# Altium PCB PCB1.PcbDoc (part 2 of 2)
Units mm, origin at the board's own origin, x right, y up, seen from the top; angles counter-clockwise.
Board outline 125 x 72.5 mm, 4 copper layers (Top Layer, GND Plane, 3V3_Plane, Bottom Layer), stack 0.603 mm thick; 52 components, 52 nets, 236 pads, 121 vias.
Unrouted connection lines stored in the file: 4.
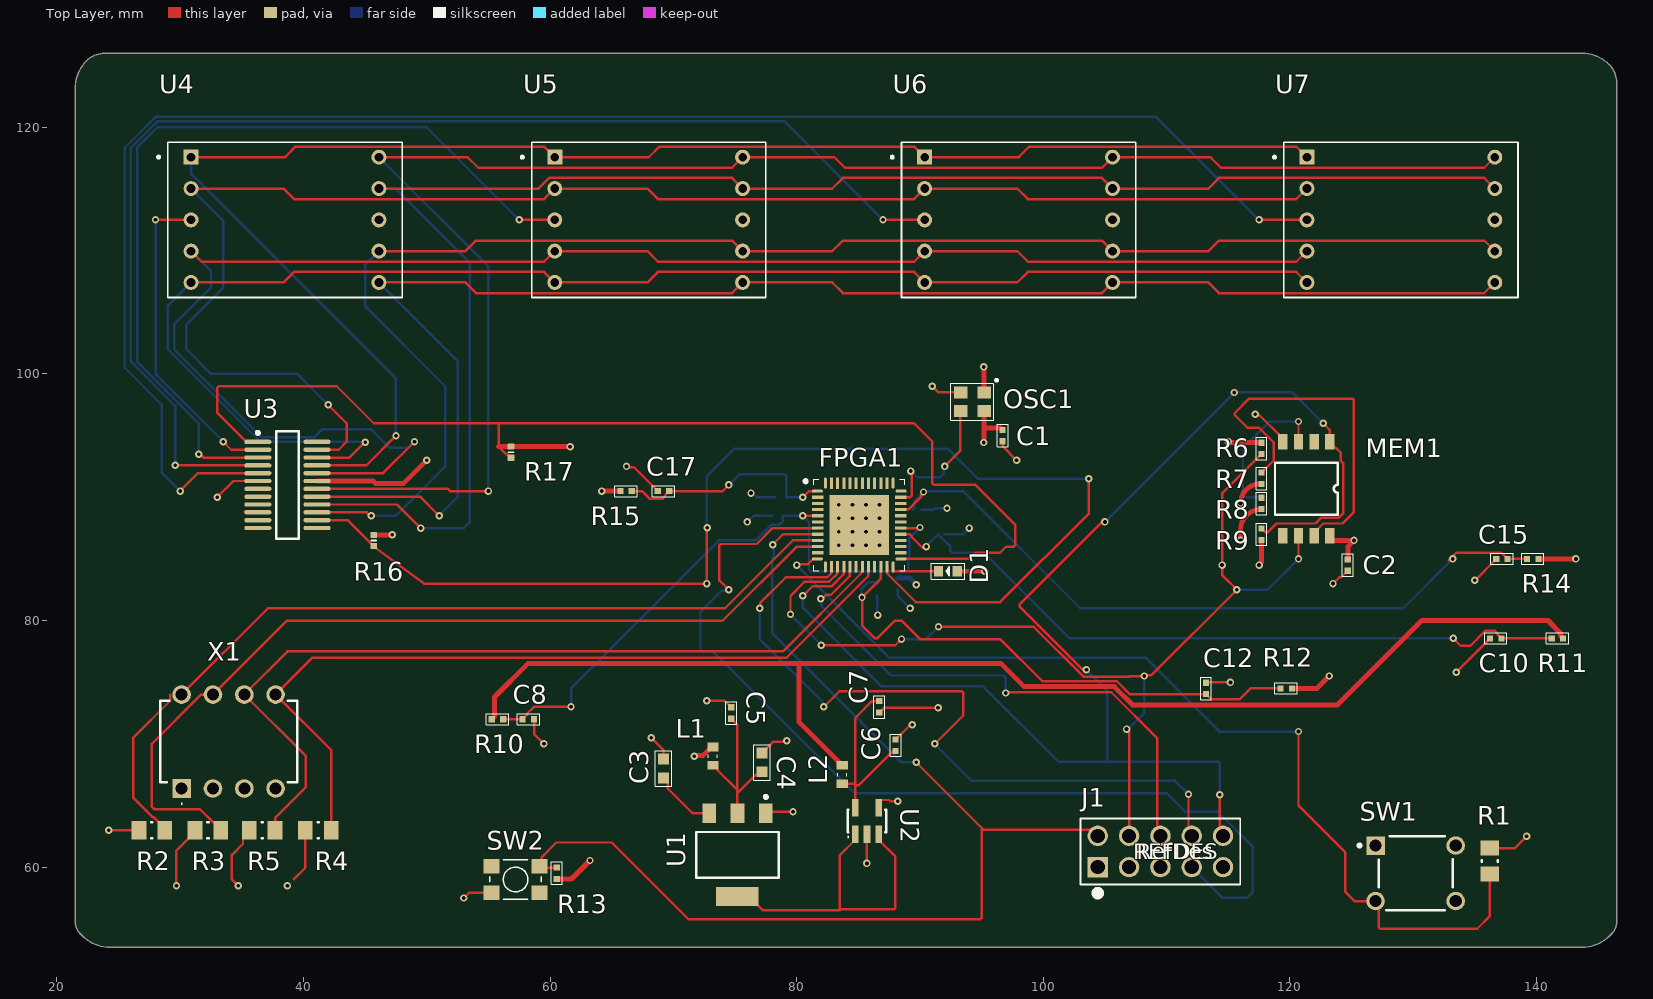
[diagram p0: Top Layer view]

## Polygon pours and split planes (outlines as drawn) (continued)
+3.3V on 3V3_Plane (split plane): 143.953,125.482 144.174,125.453 144.392,125.405 144.605,125.338 144.811,125.252 145.009,125.149 145.197,125.029 145.374,124.893 145.527,124.754 145.537,124.741 145.549,124.731 145.654,124.613 145.755,124.472 145.839,124.32 145.905,124.16 145.953,123.993 145.982,123.822 145.991,123.664 145.99,123.649 145.99,101 145.99,55.5 145.991,55.488 145.983,55.391 145.957,55.284 145.915,55.183 145.858,55.089 145.795,55.015 145.785,55.007 145.537,54.759 145.527,54.746 145.374,54.607 145.197,54.471 145.009,54.351 144.811,54.248 144.605,54.162 144.392,54.095 144.174,54.047 143.953,54.018 143.747,54.009 143.73,54.01 24.27,54.01 24.253,54.009 24.047,54.018 23.826,54.047 23.608,54.095 23.395,54.162 23.189,54.248 22.991,54.351 22.803,54.471 22.626,54.607 22.473,54.746 22.463,54.759 22.215,55.007 22.205,55.015 22.142,55.089 22.085,55.183 22.043,55.284 22.017,55.391 22.009,55.488 22.01,55.5 22.01,123.23 22.009,123.247 22.018,123.453 22.047,123.674 22.095,123.892 22.162,124.105 22.248,124.311 22.351,124.509 22.471,124.697 22.607,124.874 22.746,125.027 22.759,125.037 22.769,125.049 22.887,125.154 23.028,125.255 23.18,125.339 23.34,125.405 23.507,125.453 23.678,125.482 23.836,125.491 23.851,125.49 143.73,125.49 143.747,125.491

## Silkscreen, mask and mechanical layers (free items; w line width, h text height)
Mechanical 1:
  lines w0.254: 21.5,55.5 ccw(c22.707,55.5) 21.854,54.646 22.102,54.398 ccw(c24.27,56.566) 24.27,53.5 48,53.5 83,53.5 116.5,53.5 143.73,53.5 ccw(c143.73,56.566) 145.898,54.398 146.146,54.646 ccw(c145.293,55.5) 146.5,55.5 146.5,101 146.5,123.649 ccw(c144.445,123.649) 145.898,125.102 ccw(c143.73,122.934) 143.73,126 96,126 23.851,126 ccw(c23.851,123.945) 22.398,125.398 ccw(c24.566,123.23) 21.5,123.23 21.5,55.5

## Text inside footprints (layer, text, board x,y; h text height)
J1: Top Overlay "RefDes" at 107.595,60.635 h1.27; Top Overlay "REFDES" at 107.277,60.635 h1.27; Mechanical 13 "RefDes2" at 107.277,60.635 h1.27